# Altium PCB power.PcbDoc
Units mm, origin at the board's own origin, x right, y up, seen from the top; angles counter-clockwise.
Board outline 40 x 53 mm, 2 copper layers (Top Layer, Bottom Layer); 17 components, 9 nets, 59 pads, 9 vias.
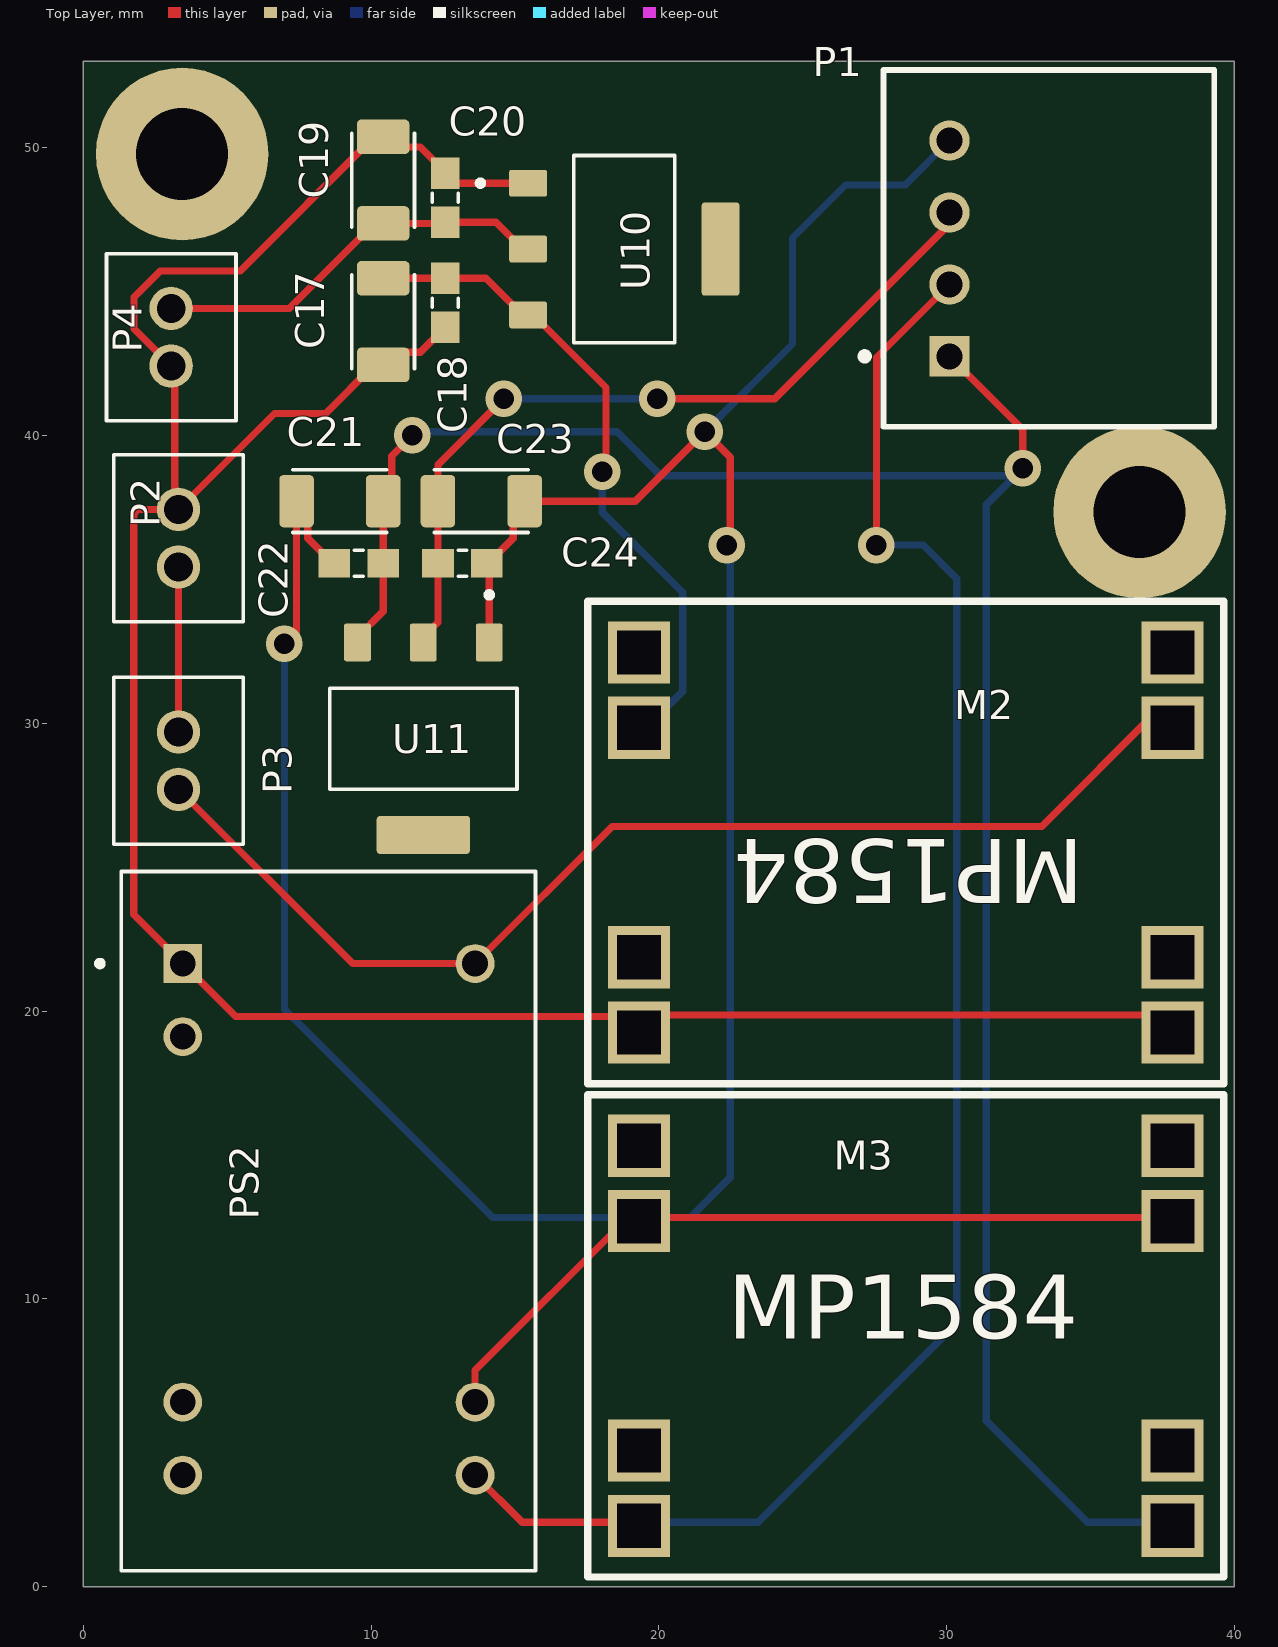
[diagram p0: Top Layer view]
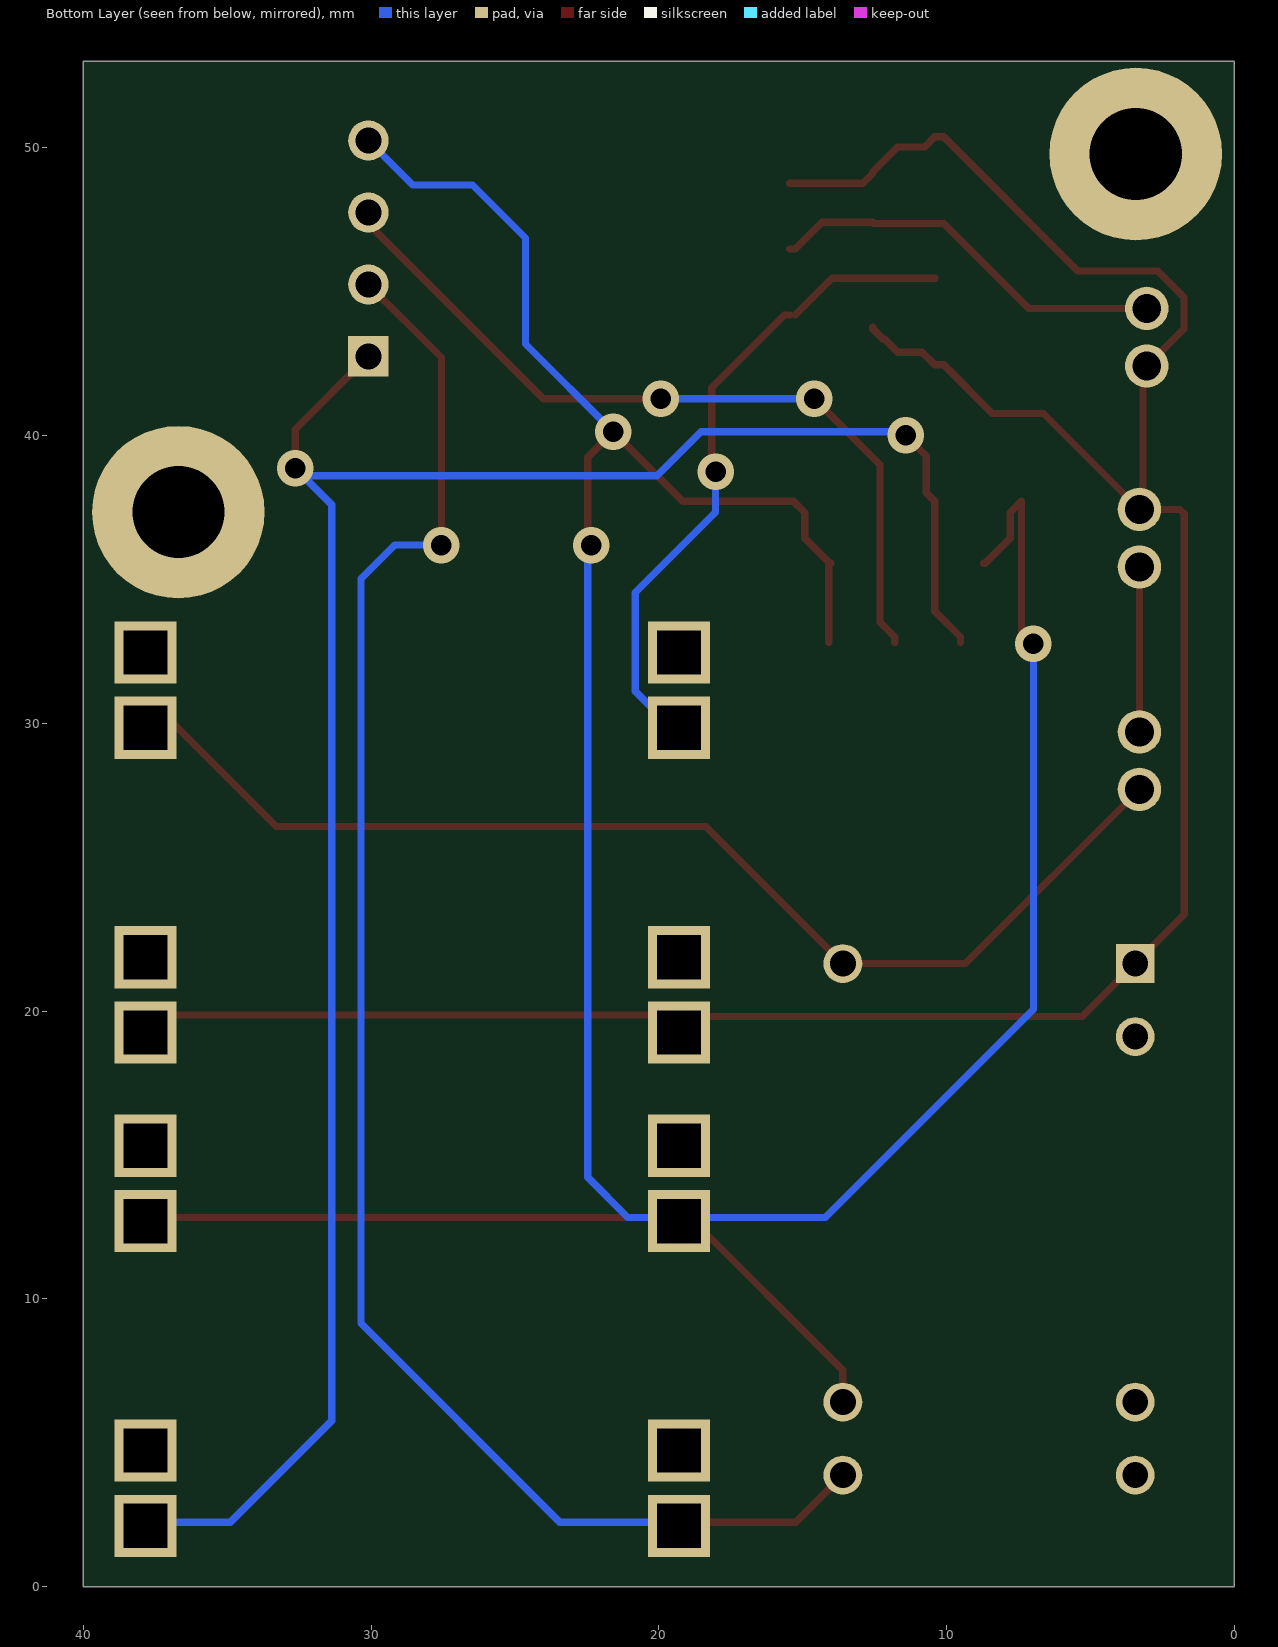
[diagram p1: Bottom Layer view, seen from below]
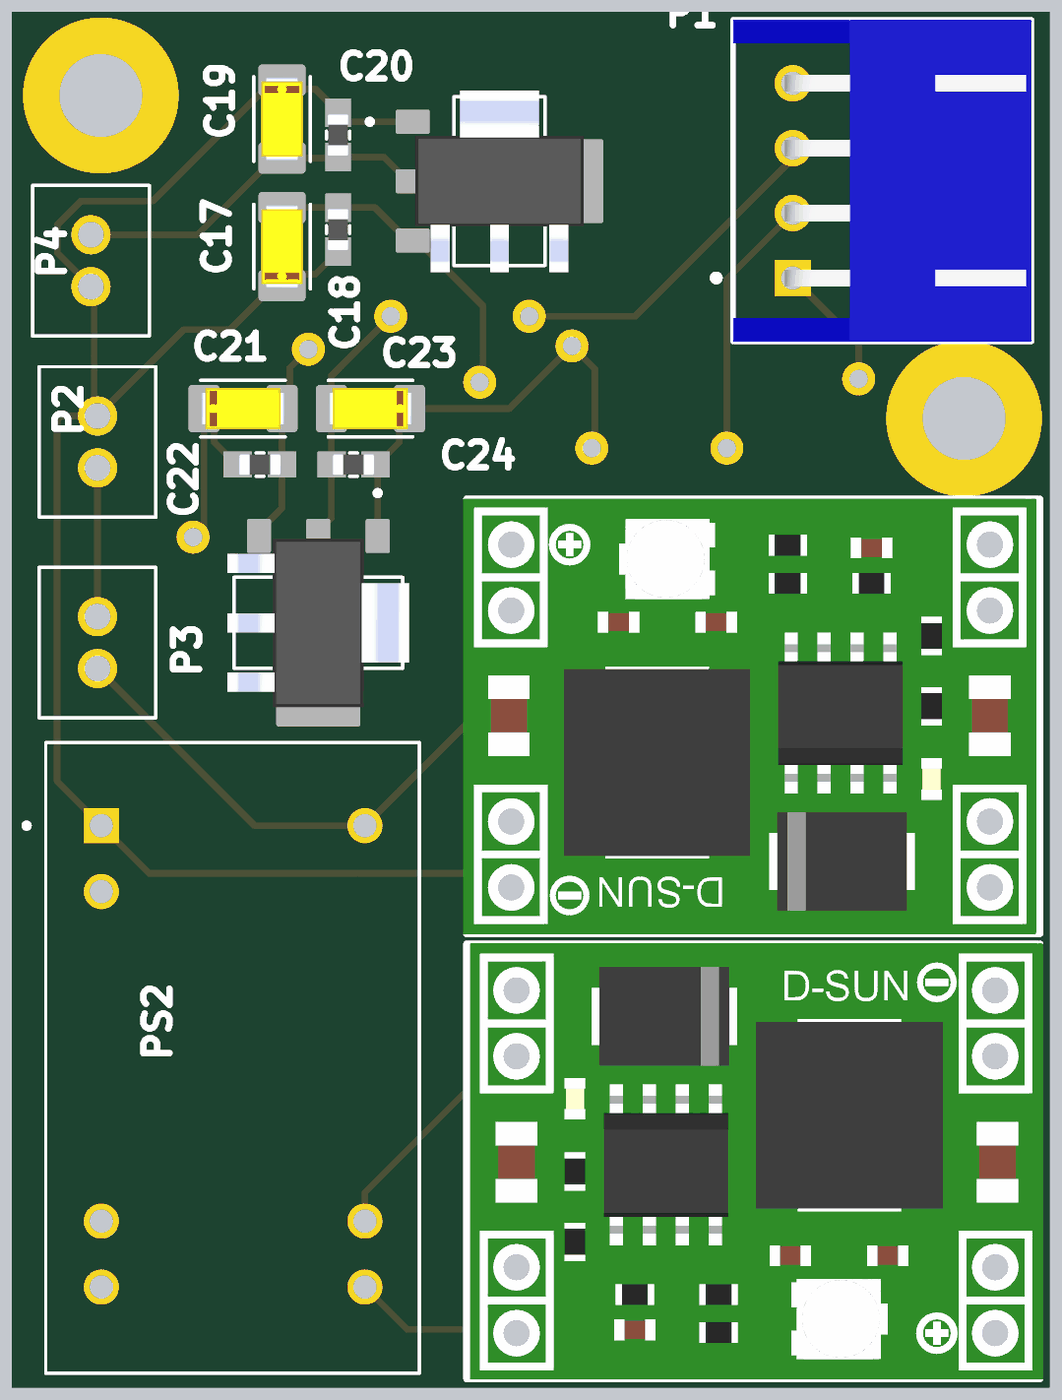
[diagram p2: 3D render of the assembled board from above, using the file's embedded part models]

## Layer stack, top to bottom
Top Solder: solder mask 0.0102, Solder Resist, Dk 3.5
Top Layer: signal copper 0.0356
Dielectric 1: dielectric 0.32, FR-4, Dk 4.8
Bottom Layer: signal copper 0.0356
Bottom Solder: solder mask 0.0102, Solder Resist, Dk 3.5

## Board outline
0,0 0,53 40,53 40,0

## Design rules (kind name [scope] priority, off if disabled: settings)
Clearance [All] p1: gap=0.254 ignorepadtopadclearanceinfootprint=FALSE
HoleSize [All] p1: absolutevalues=TRUE maxlimit=10 minlimit=0.025 maxpercent=80.000 minpercent=20.000
PolygonConnect [All] p1: connectstyle=Relief reliefconductorwidth=0.254 reliefentries=4 polygonreliefangle="90 Angle" airgapwidth=0.254
RoutingVias [All] p1: holewidth=0.711 width=1.27 viastyle="Through Hole" minholewidth=0.711 minwidth=1.27 maxholewidth=0.711 maxwidth=1.27
SolderMaskExpansion [All] p1: expansion=0 istentingtop=FALSE
SupplyNets "Schematic Supply Nets_5" [InNet('ISOLATED_MP1584')] p1: voltage=0.000
SupplyNets "Schematic Supply Nets_4" [InNet('ISO_24v')] p2: voltage=0.000
SupplyNets "Schematic Supply Nets_3" [InNet('GND')] p3: voltage=0.000
SupplyNets "Schematic Supply Nets_2" [InNet('3.3v')] p4: voltage=0.000
SupplyNets "Schematic Supply Nets_1" [InNet('ISO_3.3v')] p5: voltage=0.000
SupplyNets "Schematic Supply Nets" [InNet('ISO_GND')] p6: voltage=0.000
Width [All] p1: maxlimit=0.254 minlimit=0.254 preferedwidth=0.254
29 further rules are at their usual default settings.

## Components (designator, comment, footprint, x,y, rotation, side; value= is the part's Value field where it differs from the comment)
C17 "10u" RESC3216X125N 10.414,43.961 r90 top
C18 "100n" CAPC1608X90 12.573,44.616 r270 top
C19 "22u" RESC3216X125N 10.414,48.876 r270 top
C20 "100n" CAPC1608X90 12.573,48.26 r90 top
C21 "10u" RESC3216X125N 8.909,37.719 r0 top
C22 "100n" CAPC1608X90 9.564,35.56 r180 top
C23 "22u" RESC3216X125N 13.824,37.719 r180 top
C24 "100n" CAPC1608X90 13.169,35.56 r0 top
M2 "MP1584" PCBComponent_1 19.304,32.461 r180 top
M3 "MP1584" PCBComponent_1 37.846,2.108 r0 top
P1 "ISO_power" JST-S4B-XH-A(LF)(SN)_V 30.099,46.502 r90 top
P2 "battery in" JST_PHR-2 3.302,36.433 r90 top
P3 "switch" JST_PHR-2 3.302,28.702 r90 top
P4 "Normal Power" JST_PHR-2 3.048,43.418 r90 top
PS2 "TIM_2-1215" CONV_TIM_2-1215 8.509,12.7 r0 top
U10 "AMS1117-3.3" SOT229P700X180-4N 18.796,46.482 r0 top
U11 "AMS1117-3.3" SOT229P700X180-4N 11.811,29.464 r270 top

## Footprints (in the part's own frame and the unit in brackets; to place one, negate y for a bottom-side part, rotate by r counter-clockwise, add the part's x,y. Pads: shape width x height; smd on the part's side, far side on the other; paste and mask are expansions set on the pad)
CAPC1608X90 [mm]
  rect 1.1x1 smd: 1(-0.85,0) 2(0.85,0)
  silkscreen extent -0.15,-0.45 0.15,0.45, body extent -0.8,-0.4 0.8,0.4, height 0.9
CONV_TIM_2-1215 [mm]
  rect 1.35x1.35 hole 0.9: 1(-5.06,8.95)
  round 1.35 hole 0.9: 2(-5.06,6.41) 7(-5.06,-6.29) 8(-5.06,-8.83) 9(5.1,-8.83) 10(5.1,-6.29) 16(5.1,8.95)
  silkscreen extent -8.04,-12.15 7.2,12.15
JST-S4B-XH-A(LF)(SN)_V [mm] "Header, 4-Leads, Body 12.4x11.5mm, Pitch 2.5mm"
  rect 1.4x1.4 hole 0.9: 1(-3.75,0)
  round 1.4 hole 0.9: 2(-1.25,0) 3(1.25,0) 4(3.75,0)
  silkscreen extent -6.2,-9.2 6.2,3.07, body extent -6.2,-9.2 6.2,2.3, height 6.15
JST_PHR-2 [mm]
  round 1.508 hole 1: 1(-1,0) 2(1,0)
  silkscreen extent -2.9,-2.25 2.9,2.25
PCBComponent_1 [mil]
  rect 85x85 hole 60 square: 1(-730,520) 2(-730,417) 3(-730,103) 4(-730,0) 5(0,520) 6(0,417) 7(0,103) 8(0,0)
  silkscreen extent -800,-70 70,590, body extent -795,-71 75,591, height 161
RESC3216X125N [mm]
  rrect25% 1.2x1.82 smd: 1(-1.505,0) 2(1.505,0)
  silkscreen extent -1.63,-1.09 1.63,1.09, body extent -1.6,-0.8 1.6,0.8, height 1.8
SOT229P700X180-4N [mm]
  rrect15% 1.31x0.93 smd: 1(-3.345,2.29) 2(-3.345,0) 3(-3.345,-2.29)
  rrect15% 1.31x3.24 smd: 4(3.345,0)
  silkscreen extent -5.1,-3.25 1.75,3.25, body extent -3.25,-3.5 3.25,3.5, height 1.8

## Part data
C17 C19 C21 C23: library part T491A106K016AT, "Capacitors Tantalum PCB 10uF SMD Tol 10% 16 VDC Case Size 3216 T491 Series", Package="SMD-2 KEMET", Check_prices=https://www.snapeda.com/parts/T491A106K016AT/KEMET/view-part/?ref=eda, MF=KEMET, MP=T491A106K016AT, SnapEDA_Link=https://www.snapeda.com/parts/T491A106K016AT/KEMET/view-part/?ref=snap
C18 C20 C22 C24: library part C0603KRX7R9BB102, "0603 1 nF 50 V Â±10 % Tolerance X7R Surface Mount Ceramic Capacitor", Package="0603 Yageo", Check_prices=https://www.snapeda.com/parts/C0603KRX7R9BB102/Yageo/view-part/?ref=eda, MF=Yageo, MP=C0603KRX7R9BB102, SnapEDA_Link=https://www.snapeda.com/parts/C0603KRX7R9BB102/Yageo/view-part/?ref=snap
M2 M3: library part Component_1
P1: library part CMP-1755-00007-1, "Male Header, Pitch 2.5 mm, 1 x 4 Position, Height 6.1 mm, Tail Length 3.4 mm, -25 to 85 degC, RoHS, Bulk", ComponentLink1Description="Manufacturer URL", ComponentLink1URL=http://www.jst.com/home2.html, ComponentLink2Description=Datasheet, ComponentLink2URL=http://www.jst-mfg.com/product/pdf/eng/eXH.pdf, DatasheetVersion=May-16, PackageDescription="Male Header, Pitch 2.5 mm, 1 x 4 Position, Height 6.1 mm, Tail Length 3.4 mm", PackageReference=S4B-XH-A(LF)(SN)
P2 P3 P4: library part PHR-2, "PH Series 2 Position 2 mm Pitch Free Hanging Housing Connector", Package=None, Availability=Unavailable, MP=PHR-2, Price=None
PS2: Package=None, Availability=Unavailable, MP=TIM_2-1215, Price=None
U10 U11: "Sot223/Pkg 1-Amp 3.3-Volt Low Drop Out Voltage Regulatator", Package="SOT-223 Seeed Technology", Check_prices=https://www.snapeda.com/parts/AMS1117-3.3/Advanced+Monolithic+Systems/view-part/?ref=eda, MF="Advanced Monolithic Systems", MP=AMS1117-3.3, SnapEDA_Link=https://www.snapeda.com/parts/AMS1117-3.3/Advanced+Monolithic+Systems/view-part/?ref=snap

## Free pads (board coordinates)
  round 6 hole 3.2 unplated: 7(3.429,49.784) 8(36.703,37.338)

## Via types
v1: diameter 1.27, hole 0.711, Top Layer to Bottom Layer, 9 vias

## Nets (pads, with @x,y where several pads share a name; then routed paths per layer and width w, separated by ;. In a path a pad name is that pad's centre, name@x,y a point inside that pad or via, vN(x,y) a via of type N, cw(c..) or ccw(c..) an arc to the next point about the centre after c; other vN are vias at no path point)
3.3v: C19.2 C20.1 P4.2 U10.2 | length 14
  Top Layer w0.254: P4.2 7.151,44.418 10.104,47.371 C19.2 12.534,47.371 C20.1 14.333,47.41 15.261,46.482 U10.2
GND: C17.1 C18.2 C19.1 C20.2 M2.1 M2.5 P2.2 P4.1 PS2.1 U10.1 | length 89.3
  Top Layer w0.254: C18.2 12.573,43.716 12.2,43.343 12.15,43.343 11.705,42.898 10.856,42.898 C17.1 10.104,42.456 8.415,40.767 6.636,40.767 P2.2 ; U10.1 12.911,48.772 C20.2 12.573,49.16 11.705,50.028 10.767,50.028 C19.1 10.104,50.381 5.443,45.72 2.667,45.72 1.756,44.809 1.756,43.71 P4.1 3.175,42.291 3.175,37.56 P2.2 ; M2.1@37.338,19.863 18.796,19.863 18.745,19.812 5.287,19.812 PS2.1 1.746,23.353 1.746,37.284 1.895,37.433 P2.2
ISO_3.3v: C23.2 C24.1 P1.3 U11.2 | length 27.9
  Top Layer w0.254: U11.2 11.811,32.999 12.319,33.507 C24.1 C23.2 12.319,38.989 v1(14.605,41.275) ; v1(19.939,41.275) 24.023,41.275 P1.3@30.299,47.552
  Bottom Layer w0.254: v1(14.605,41.275) v1(19.939,41.275)
ISO_24v: M3.4 P1.2 PS2.9 | length 59.7
  Top Layer w0.254: PS2.9 15.244,2.235 M3.4@18.923,2.235 ; v1(27.559,36.195) 27.559,42.712 P1.2
  Bottom Layer w0.254: M3.4@18.923,2.235 23.444,2.235 30.353,9.144 30.353,35.023 29.181,36.195 v1(27.559,36.195) v1@27.686,36.068
ISO_GND: C21.1 C22.2 C23.1 C24.2 M3.2 M3.6 P1.4 PS2.10 U11.1 | length 120.8
  Top Layer w0.254: v1(6.985,32.766) 7.404,33.185 C21.1 7.796,37.327 7.796,36.428 8.664,35.56 C22.2 ; PS2.10 13.609,7.513 18.923,12.827 M3.6@37.465,12.827 ; C24.2 14.101,35.478 U11.1 ; C24.2@14.069,35.56 14.937,36.428 14.937,37.327 C23.1 19.177,37.719 v1(21.59,40.132) 22.479,39.243 22.479,36.322 v1(22.352,36.195)
  Bottom Layer w0.254: v1(6.985,32.766) 6.985,20.066 14.224,12.827 21.082,12.827 22.479,14.224 22.479,36.068 v1(22.352,36.195) ; v1(21.59,40.132) 24.638,43.18 24.638,46.863 26.483,48.708 28.555,48.708 P1.4
ISOLATED_MP1584: C21.2 C22.1 M3.8 P1.1 U11.3 | length 75.4
  Top Layer w0.254: U11.3 9.521,32.999 10.414,33.892 C22.1 C21.2 10.712,38.017 10.712,39.287 v1(11.43,40.005) ; P1.1 32.639,40.212 v1(32.639,38.862)
  Bottom Layer w0.254: v1(11.43,40.005) 11.557,40.132 18.542,40.132 20.066,38.608 32.385,38.608 31.369,37.592 31.369,5.762 34.896,2.235 M3.8@37.465,2.235
NetC17_2: C17.2 C18.1 M2.7 U10.3 | length 23.2
  Top Layer w0.254: C17.2 C18.1 13.987,45.466 U10.3@15.261,44.192 ; U10.3 15.641,44.192 18.161,41.672 18.161,38.862 v1(18.034,38.735)
  Bottom Layer w0.254: v1(18.034,38.735) 18.034,37.338 20.828,34.544 20.828,31.115 20.168,30.455 M2.7@18.796,30.455
NetM2_3: M2.3 P3.1 PS2.16 | length 40.2
  Top Layer w0.254: P3.1 9.354,21.65 PS2.16 18.375,26.416 33.299,26.416 M2.3@37.338,30.455
NetP2_1: P2.1 P3.2 | length 5.7
  Top Layer w0.254: P3.2 P2.1
pads on no net: M2.2 M2.4 M2.6 M2.8 M3.1 M3.3 M3.5 M3.7 PS2.2 PS2.7 PS2.8 U10.4 U11.4

## Silkscreen, mask and mechanical layers (free items; w line width, h text height)
Mechanical 1:
  the board outline again, w0.254